# Altium PCB G2Prj.PcbDoc
Units mil, origin at the board's own origin, x right, y up, seen from the top; angles counter-clockwise.
Board outline 1974 x 2602 mil, 2 copper layers (Top Layer, Bottom Layer); 33 components, 14 nets, 110 pads, 18 vias.
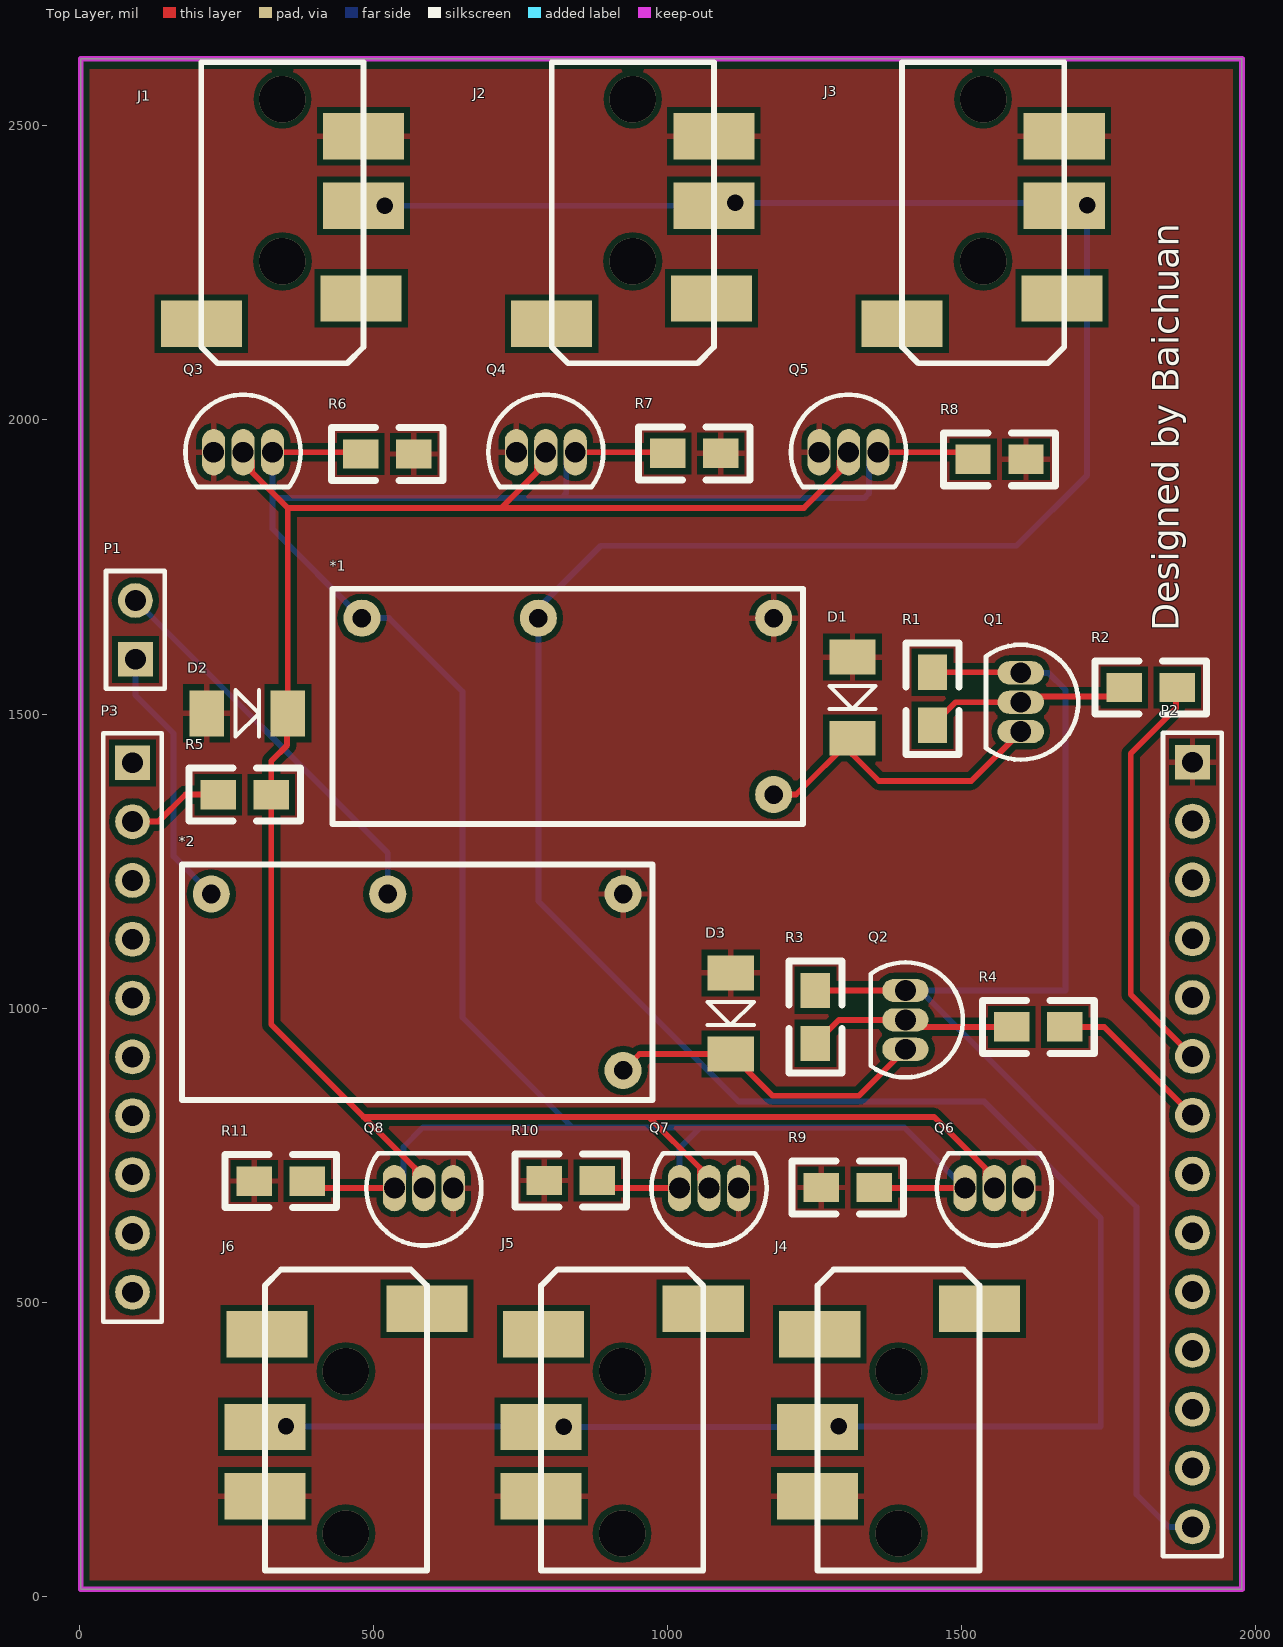
[diagram p0: Top Layer view]
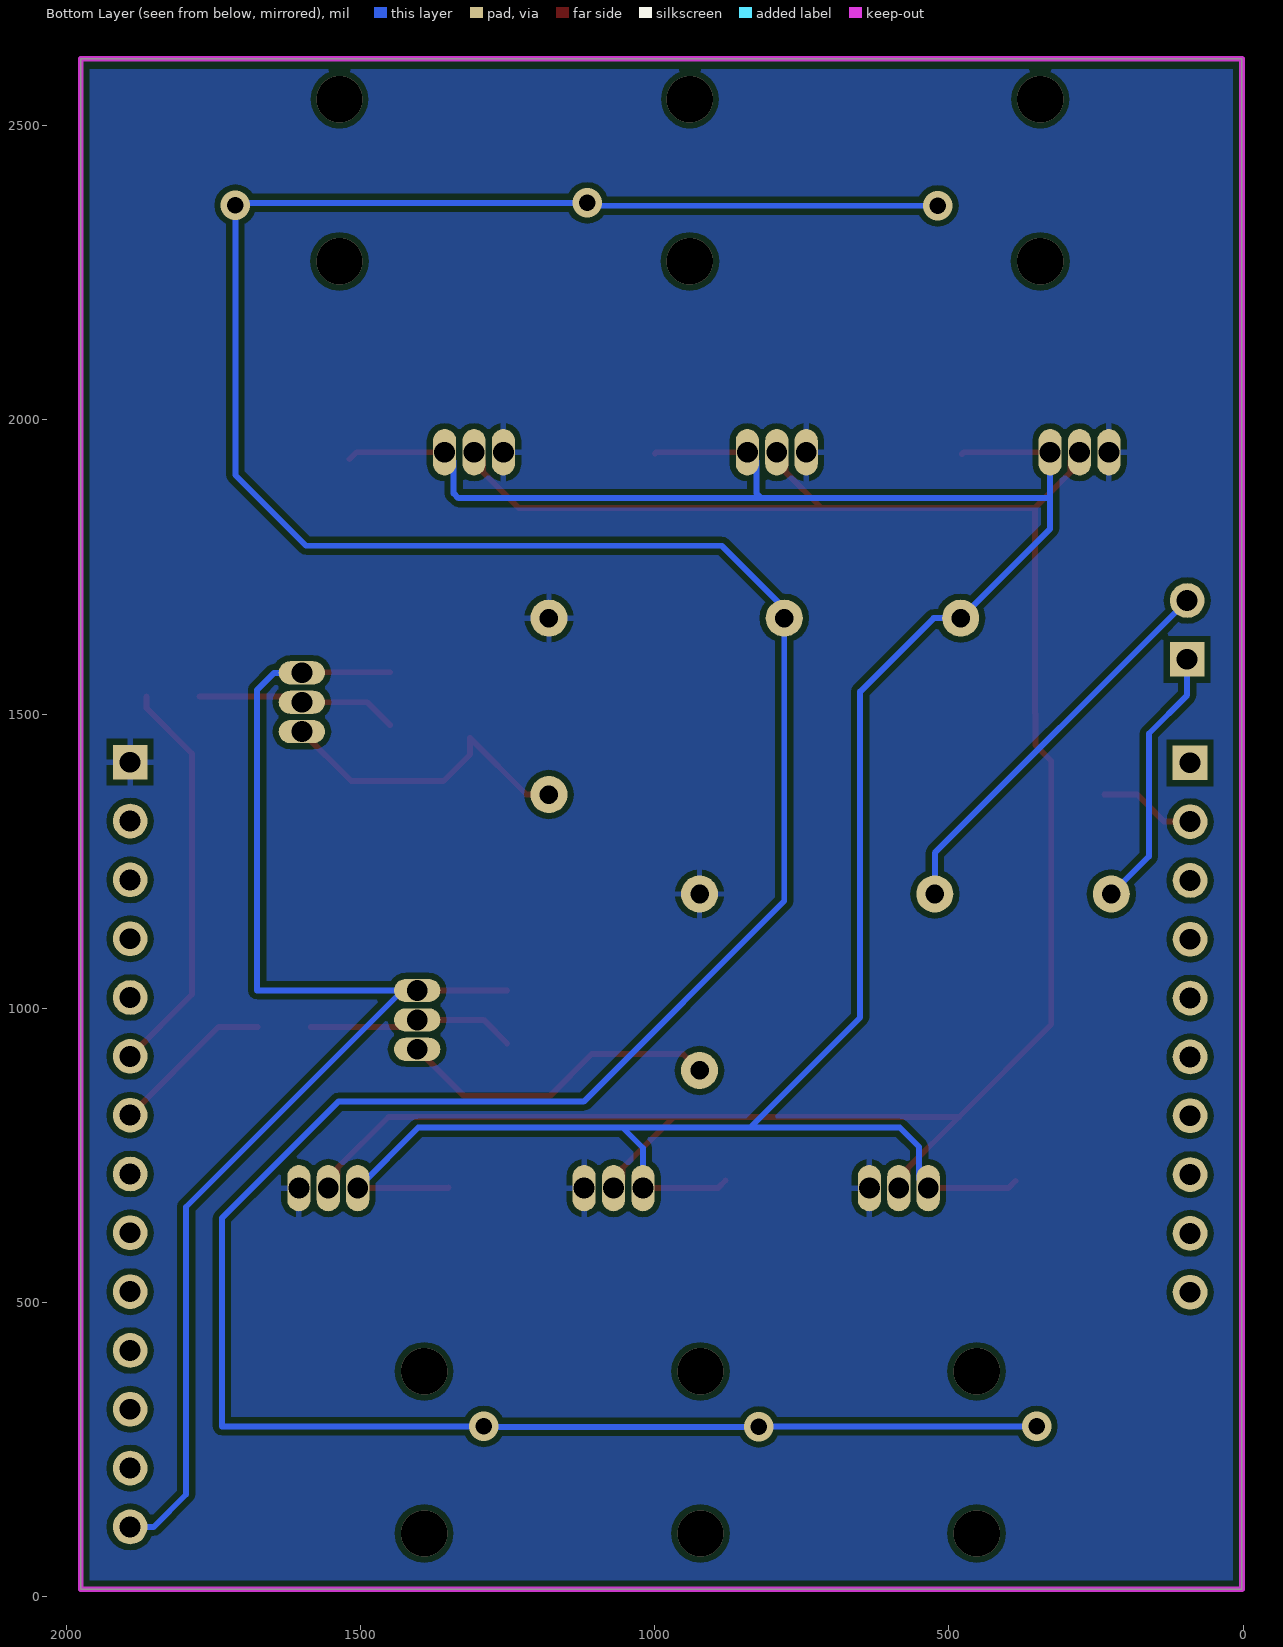
[diagram p1: Bottom Layer view, seen from below]

## Layer stack, top to bottom
Top Solder: solder mask 0.4, Solder Resist, Dk 3.5
Top Layer: signal copper 1.4
Dielectric 1: dielectric 12.6, FR-4, Dk 4.8
Bottom Layer: signal copper 1.4
Bottom Solder: solder mask 0.4, Solder Resist, Dk 3.5

## Board outline
2,12 1976,12 1976,2614 2,2614

## Design rules (kind name [scope] priority, off if disabled: settings)
Clearance [All] p1: gap=10
PolygonConnect [All] p1: connectstyle=Relief reliefconductorwidth=10 reliefentries=4 polygonreliefangle="90 Angle" airgapwidth=10
RoutingVias [All] p1: holewidth=28 width=50 viastyle="Through Hole" minholewidth=28 minwidth=50 maxholewidth=28 maxwidth=50
SilkToSilkClearance [All] p1: silktosilkclearance=0
SolderMaskExpansion [All] p1: expansion=4
UnpouredPolygon [All] p1: allowunpoured=FALSE
Width [All] p1: maxlimit=50 minlimit=10 preferedwidth=10
28 further rules are at their usual default settings.

## Components (designator, comment, footprint, x,y, rotation, side; value= is the part's Value field where it differs from the comment)
*1 "继电器" PCBComponent_1 1180,1663 r180 top
*2 "继电器" PCBComponent_1 924,1194 r180 top
D1 "Diode" DIODE-1206 1314,1596.8 r270 top
D2 "Diode" DIODE-1206 216.2,1501 r0 top
D3 "Diode" DIODE-1206 1107,1059.8 r270 top
J1 "3.5mmAudio" Audio 482.59,2482.11 r270 top
J2 "3.5mmAudio" Audio 1078.3,2482.11 r270 top
J3 "3.5mmAudio" Audio 1674,2482.11 r270 top
J4 "3.5mmAudio" Audio 1254.41,169.89 r90 top
J5 "3.5mmAudio" Audio 784.7,169.89 r90 top
J6 "3.5mmAudio" Audio 315,169.89 r90 top
P1 "Header 2" HDR1X2 95,1593 r90 top
P2 "Header 14" HDR1X14 1892,1418 r270 top
P3 "Header 10" HDR1X10 90,1417 r270 top
Q1 "S8550" TO-92A 1600,1520 r180 top
Q2 "S8550" TO-92A 1404,980 r180 top
Q3 "S8050" TO-92A 278,1944.99 r270 top
Q4 "S8050" TO-92A 792.69,1944.99 r270 top
Q5 "S8050" TO-92A 1307.39,1944.99 r270 top
Q6 "S8050" TO-92A 1555.09,694.01 r90 top
Q7 "S8050" TO-92A 1070.19,694.01 r90 top
Q8 "S8050" TO-92A 585.28,694.01 r90 top
R1 "10k" 0805 1450,1481 r90 top
R2 "4.7K" 0805 1866,1545 r180 top
R3 "10k" 0805 1251,940 r90 top
R4 "4.7K" 0805 1675,968 r180 top
R5 "47k" 0805 236,1363 r0 top
R6 "2K" 0805 568,1942 r180 top
R7 "2K" 0805 1000,1943 r0 top
R8 "2K" 0805 1609,1933 r180 top
R9 "2K" 0805 1351,695 r180 top
R10 "2K" 0805 790,707 r0 top
R11 "2K" 0805 387.09,706 r180 top

## Footprints (in the part's own frame and the unit in brackets; to place one, negate y for a bottom-side part, rotate by r counter-clockwise, add the part's x,y. Pads: shape width x height; smd on the part's side, far side on the other; paste and mask are expansions set on the pad)
0805 [mil]
  rect 60x50 smd: 1(0,0) 2(90,0)
  silkscreen extent -50,-45 140,45
Audio [mm]
  rect 2x3.5 smd: 2(0,0) 3(3,0) 4(7,-0.1) 5(8.1,-7)
  silkscreen extent -3.2,-7 9.8,0
DIODE-1206 [mm] "玻璃封装二极管"
  rect 1.5x2 smd: 1(0,0) 2(3.5,0)
  silkscreen extent 1.25,-1 2.25,1
HDR1X2 [mm] "Connector; Header; 2 Position"
  rect 1.5x1.5 hole 0.9: 1(0,0)
  round 1.5 hole 0.9: 2(2.54,0)
  silkscreen extent -1.27,-1.27 3.81,1.27
HDR1X10 [mm] "Connector; Header; 10 Position"
  rect 1.5x1.5 hole 0.9: 1(0,0)
  round 1.5 hole 0.9: 2(2.54,0) 3(5.08,0) 4(7.62,0) 5(10.16,0) 6(12.7,0) 7(15.24,0) 8(17.78,0) 9(20.32,0) 10(22.86,0)
  silkscreen extent -1.27,-1.27 24.13,1.27
HDR1X14 [mm] "Connector; Header; 14 Position"
  rect 1.5x1.5 hole 0.9: 1(0,0)
  round 1.5 hole 0.9: 2(2.54,0) 3(5.08,0) 4(7.62,0) 5(10.16,0) 6(12.7,0) 7(15.24,0) 8(17.78,0) 9(20.32,0) 10(22.86,0) 11(25.4,0) 12(27.94,0) 13(30.48,0) 14(33.02,0)
  silkscreen extent -1.27,-1.27 34.29,1.27
PCBComponent_1 [mm]
  round 1.6 hole 0.8: 1(0,0) 2(0,7.62) 3(10.16,0) 4(17.78,0)
  silkscreen extent -1.27,-1.27 19.05,8.89
TO-92A [mm]
  oval 2x1 hole 0.9: 1(0,-1.27) 2(0,0) 3(0,1.27)
  silkscreen extent -2.48,-2.48 1.5,2.48

## Part data
*1 *2: library part Component_1
D1 D2 D3: "二极管"
P1: "Header, 2-Pin"
P2: "Header, 14-Pin"
P3: "Header, 10-Pin"
Q1 Q2: "PNP三极管"
Q3 Q4 Q5 Q6 Q7 Q8: "NPN三极管"
R1 R2 R3 R4 R5 R6 R7 R8 R9 R10 R11: library part RES, "Resistor"

## Via types
v1: diameter 78.74, hole 78.74, Top Layer to Bottom Layer, 12 vias
v2: diameter 50, hole 28, Top Layer to Bottom Layer, 6 vias

## Nets (pads, with @x,y where several pads share a name; then routed paths per layer and width w, separated by ;. In a path a pad name is that pad's centre, name@x,y a point inside that pad or via, vN(x,y) a via of type N, cw(c..) or ccw(c..) an arc to the next point about the centre after c; other vN are vias at no path point)
AUTOin: *1.4 Q3.3 Q4.3 Q5.3 Q6.3 Q7.3 Q8.3 R6.2 R7.1 R8.2 R9.1 R10.2 R11.1 | length 4701.3
  Top Layer w10: Q3.3 475.01,1944.99 R6.2 ; R11.1 399.09,694.01 Q8.3 ; Q4.3 998.01,1944.99 R7.1 ; R10.2 892.99,694.01 Q7.3 ; R9.1 1351.99,694.01 Q6.3 ; Q5.3 1507.01,1944.99 R8.2
  Bottom Layer w10: Q3.3 328,1867 ; Q8.3 550.59,709.32 550.59,763.92 583.68,797 838,797 ; Q4.3 827.38,1929.68 827.38,1875.08 819.3,1867 ; Q7.3 1020.19,762.19 1055,797 ; Q5.3 1342.07,1929.68 1342.07,1875.08 1333.99,1867 819.3,1867 ; Q6.3 1402.1,797 1055,797 ; 328,1867 328,1815 *1.4 526,1663 651,1538 651,984 838,797 ; 328,1867 819.3,1867 ; 838,797 1055,797
AUTOout: *1.3 J1.3 J2.3 J3.3 J4.3 J5.3 J6.3 | length 6100.4
  Bottom Layer w10: v2(351,289) 822,289 v2(823,288) 1290,288 v2(1291,289) 1736,289 1736,643 1538,841 1121,841 780,1182 *1.3 780,1680 886,1786 1593,1786 1713,1906 v2(1713,2365) 1709,2369 v2(1115,2369) 1110,2364 v2(519,2364)
GND: *1.1 *2.1 D1.1 D2.1 D3.1 J1.2 J2.2 J3.2 J4.2 J5.2 J6.2 P2.1 Q3.1 Q4.1 Q5.1 Q6.1 Q7.1 Q8.1 R6.1 R7.2 R8.1 R9.2 R10.1 R11.2 | length 5.2
  Top Layer w10: Q7.1@1120.19,688.81 Q7.1
Net*1_2: *1.2 D1.2 Q1.3 | length 541.2
  Top Layer w10: *1.2 1218,1363 D1.2 1314,1431 1359,1386 1516,1386 Q1.3
Net*2_2: *2.2 D3.2 Q2.3 | length 553.7
  Top Layer w10: *2.2 952,922 D3.2 1178,851 1325,851 Q2.3
NetD2_2: D2.2 Q3.2 Q4.2 Q5.2 Q6.2 Q7.2 Q8.2 R5.2 | length 3827.9
  Top Layer w10: Q3.2 293.32,1929.68 293.32,1910.94 354,1850.26 ; Q8.2 569.96,709.32 569.96,728.06 483,815.02 ; Q4.2 777.38,1929.68 777.38,1910.94 716.69,1850.26 ; Q7.2 1054.87,709.32 1054.87,728.06 967.91,815.02 ; Q5.2 1292.07,1929.68 1292.07,1910.94 1231.39,1850.26 716.69,1850.26 ; Q6.2 1539.78,709.32 1539.78,728.06 1452.81,815.02 967.91,815.02 ; 354,1850.26 716.69,1850.26 ; 354,1850.26 D2.2 353,1500 353,1447 326,1420 R5.2 326,972.02 483,815.02 ; 483,815.02 967.91,815.02
NetQ1_2: Q1.2 R1.1 R2.2 | length 344.3
  Top Layer w10: R1.1 1489,1520 Q1.2 1610,1530 R2.2@1774,1530
NetQ2_2: Q2.2 R3.1 R4.2 | length 355.5
  Top Layer w10: R3.1 1291,980 Q2.2 1416,968 R4.2
P1.0: P3.2 R5.1 | length 165.1
  Top Layer w10: P3.2 134,1317 180,1363 R5.1
P1.6: P2.7 R4.1 | length 279.1
  Top Layer w10: R4.1 1742,968 P2.7
P1.7: P2.6 R2.1 | length 687.4
  Top Layer w10: R2.1@1864,1530 1864,1510 1787,1433 1787,1023 P2.6
USBin: *2.4 P1.1 | length 452.4
  Bottom Layer w10: P1.1 95,1532 160,1467 160,1258 *2.4
USBout: *2.3 P1.2 | length 676.7
  Bottom Layer w10: P1.2 524,1264 *2.3
VCC: P2.14 Q1.1 Q2.1 R1.2 R3.2 | length 2326.6
  Top Layer w10: R3.2 Q2.1 ; R1.2 1599,1571 Q1.1
  Bottom Layer w10: Q1.1 1647,1570 1676,1541 1676,1030 Q2.1 1429,1030 1797,662 1797,173 1852,118 P2.14
pads on no net: J1.4 J1.5 J2.4 J2.5 J3.4 J3.5 J4.4 J4.5 J5.4 J5.5 J6.4 J6.5 P2.2 P2.3 P2.4 P2.5 P2.8 P2.9 P2.10 P2.11 P2.12 P2.13 P3.1 P3.3 P3.4 P3.5 P3.6 P3.7 P3.8 P3.9 P3.10
copper on no net:
  other v1: 452.8,106.9 922.5,106.9 1392.21,106.9 452.8,382.49 922.5,382.49 1392.21,382.49 344.79,2269.51 940.5,2269.51 1536.2,2269.51 344.79,2545.1 940.5,2545.1 1536.2,2545.1

## Polygon pours and split planes (outlines as drawn)
GND on Top Layer "Bottom Layer-No Net" (solid, remove dead copper, pour order 33): 2,2596 1973,2596 1981,2588 1976,2583 1976,12 -5,12 -6,11
GND on Bottom Layer "Bottom Layer-No Net" (solid, remove dead copper, pour order 35): 2,12 1976,12 1976,2585 1965,2596 2,2596

## Keep-outs
Keep-Out Layer:
  the board outline again, w10

## Silkscreen, mask and mechanical layers (free items; w line width, h text height)
Top Overlay:
  text "Designed by Baichuan" at 1869,1641 h45 r90